# EAGLE board Ground Station 2019-2020 (EAGLE 9.1.3)
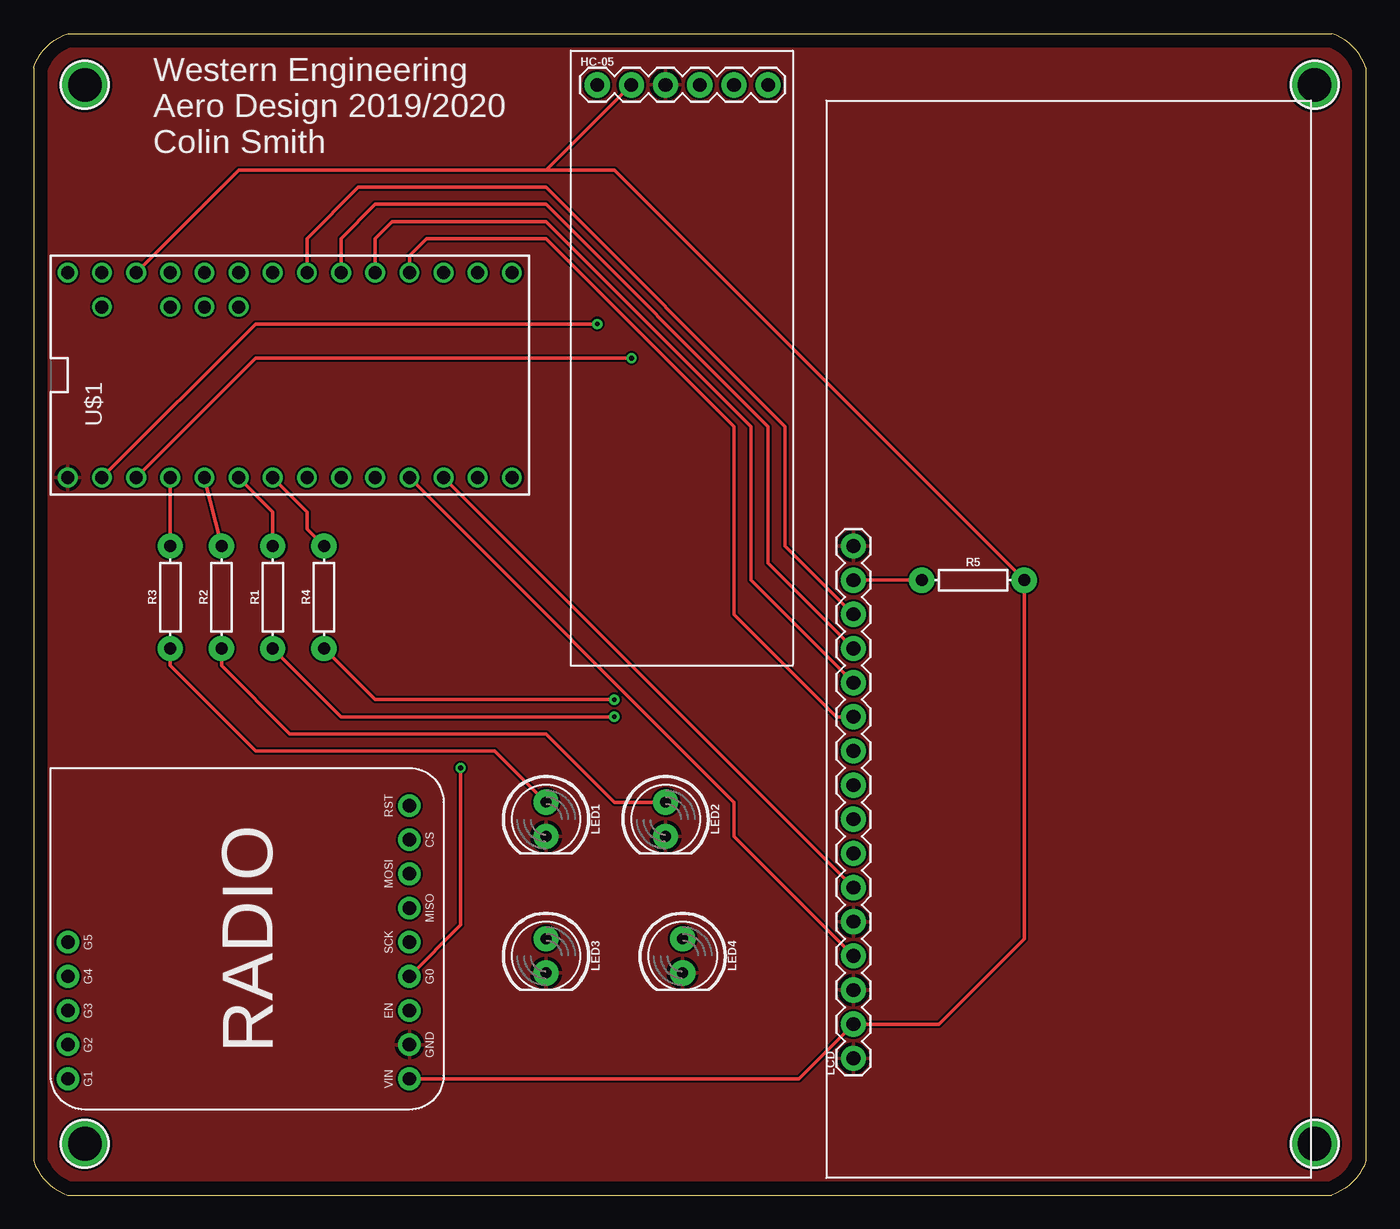
[diagram p0: board, top side]
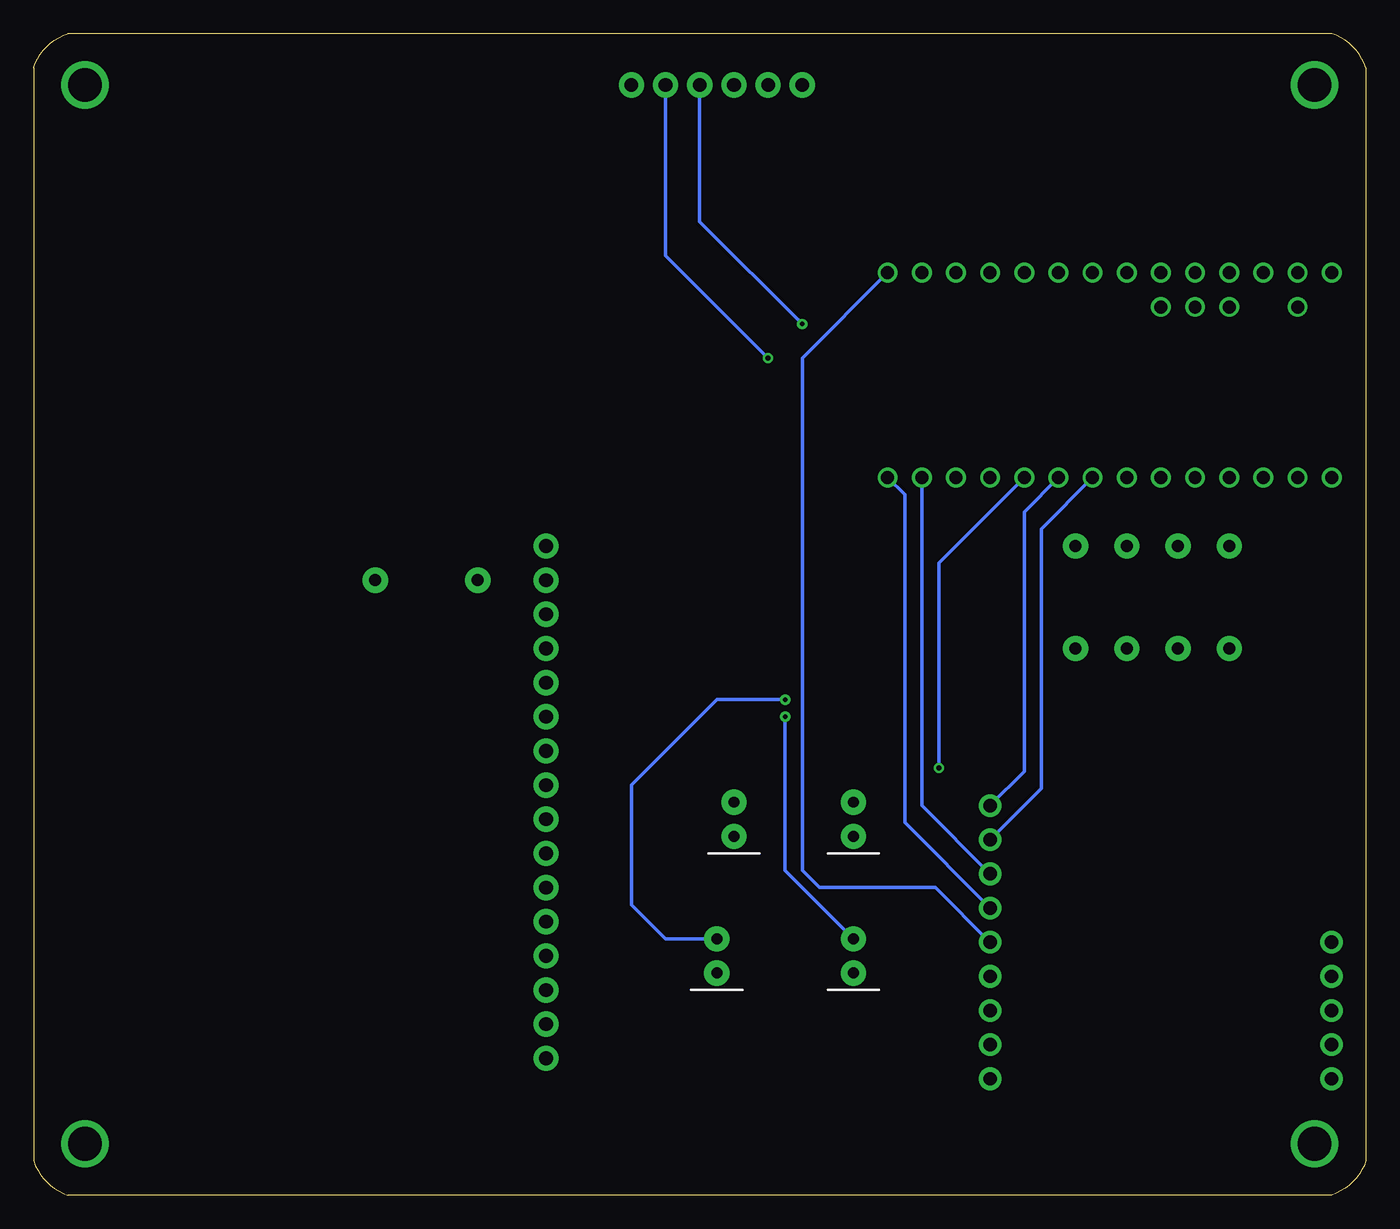
[diagram p1: board, bottom side, seen from below]

Size 99.06 x 86.36 mm. Coordinates in mm from the lower left corner, seen from the top.
Outline: 2.54,0 82.55,0 96.52,0 arc53 99.06,2.54 99.06,20.32 99.06,83.82 arc53 96.52,86.36 95.25,86.36 82.55,86.36 2.54,86.36 arc53 0,83.82 0,19.05 0,3.81 0,2.54 arc53 2.54,0
Copper layers (1*16): Top 0.035mm / dielectric 1.5mm / Bottom 0.035mm
Design rules "default": minimum track width 6mil, minimum drill 0.35mm, track to track 6mil, track to pad 6mil, pad to pad 6mil, via to via 6mil, smd to smd 6mil, copper to edge 40mil, drill to drill 6mil, minimum pad ring 10mil, minimum via ring 8mil, stop-mask expansion 4mil, vias tented up to drill 0mil, thermal gap 10mil

## Footprints (pad centres in the part's own frame; a part is rotated, then mirrored left to right if it is on the bottom)
1X06 = drill 1.016 pad 1.88: 1 0,0; 2 2.54,0; 3 5.08,0; 4 7.62,0; 5 10.16,0; 6 12.7,0
1X16 = drill 1.016 pad 1.88: 1 0,0; 2 2.54,0; 3 5.08,0; 4 7.62,0; 5 10.16,0; 6 12.7,0; 7 15.24,0; 8 17.78,0; 9 20.32,0; 10 22.86,0; 11 25.4,0; 12 27.94,0; 13 30.48,0; 14 33.02,0; 15 35.56,0; 16 38.1,0
LED_5MM = drill 0.813 pad 1.88: A -1.27,0; K 1.27,0
AXIAL-0.3 = drill 0.9 pad 1.88: P$1 -3.81,0; P$2 3.81,0
ADAFRUIT_RFM95W_LORA_RADIO = drill 1 pad 1.676: 1 2.29,-26.67; 2 4.83,-26.67; 3 7.37,-26.67; 4 9.91,-26.67; 5 12.45,-26.67; 6 14.99,-26.67; 7 17.53,-26.67; 8 20.07,-26.67; 9 22.61,-26.67; 10 2.29,-1.27; 11 4.83,-1.27; 12 7.37,-1.27; 13 9.91,-1.27; 14 12.45,-1.27
TEENSY_3.0-3.2&LC_DIL+4 = drill 0.965: 0 -7.62,13.97; 1 -7.62,11.43; 2 -7.62,8.89; 3 -7.62,6.35; 3.3V 7.62,11.43; 4 -7.62,3.81; 5 -7.62,1.27; 6 -7.62,-1.27; 7 -7.62,-3.81; 8 -7.62,-6.35; 9 -7.62,-8.89; 10 -7.62,-11.43; 11 -7.62,-13.97; 12 -7.62,-16.51; 13 7.62,-16.51; 14/A0 7.62,-13.97; 15/A1 7.62,-11.43; 16/A2 7.62,-8.89; 17/A3 7.62,-6.35; 18/A4 7.62,-3.81; 19/A5 7.62,-1.27; 20/A6 7.62,1.27; 21/A7 7.62,3.81; 22/A8 7.62,6.35; 23/A9 7.62,8.89; A10 5.08,6.35; A11 5.08,3.81; AGND 7.62,13.97; AREF 5.08,8.89; GND -7.62,16.51; VIN 7.62,16.51; VUSB 5.08,13.97
MOUNTINGHOLE_2.5_PLATED = drill 2.5 pad 3.2: P$1 0,0

## Placement (x,y rotation side)
HC-05  [1X06]  41.91,82.55 0 top
LCD  [1X16]  60.96,10.16 90 top
LED1  [LED_5MM]  38.1,27.94 270 top
LED2  [LED_5MM]  46.99,27.94 270 top
LED3  [LED_5MM]  38.1,17.78 270 top
LED4  [LED_5MM]  48.26,17.78 270 top
R1  330  [AXIAL-0.3]  17.78,44.45 90 top
R2  330  [AXIAL-0.3]  13.97,44.45 90 top
R3  330  [AXIAL-0.3]  10.16,44.45 90 top
R4  330  [AXIAL-0.3]  21.59,44.45 90 top
R5  220  [AXIAL-0.3]  69.85,45.72 0 top
U1  ADAFRUIT_RFM95W_LORA_RADIO  [ADAFRUIT_RFM95W_LORA_RADIO]  1.27,6.35 90 top
U$1  TEENSY_3.1-3.2_DIL+4  [TEENSY_3.0-3.2&LC_DIL+4]  19.05,60.96 90 top
U$2  MOUNTINGHOLE2.5  [MOUNTINGHOLE_2.5_PLATED]  3.81,3.81 0 top
U$3  MOUNTINGHOLE2.5  [MOUNTINGHOLE_2.5_PLATED]  95.25,3.81 0 top
U$4  MOUNTINGHOLE2.5  [MOUNTINGHOLE_2.5_PLATED]  95.25,82.55 0 top
U$5  MOUNTINGHOLE2.5  [MOUNTINGHOLE_2.5_PLATED]  3.81,82.55 0 top

## Library data of the parts
HC-05 = SparkFun-Connectors; PROD_ID: CONN-08437
LCD = SparkFun-Connectors
LED1-LED4 = SparkFun-LED
R1-R5 = SparkFun-Resistors; PROD_ID: RES-8371
U1 = AERO_Eagle_Library
U$1 = Teensy_3_and_LC_Series_Boards_v1.4
U$2-U$5 = microbuilder

## Nets
3.3V: HC-05.2 LCD.2 R5.P$2 U1.1 U$1.3.3V
AGND: U$1.AGND
AREF: U$1.AREF
CS: U1.8 U$1.6
D4: LCD.11 U$1.16/A2
D5: LCD.12 U$1.17/A3
D6: LCD.13 U$1.18/A4
D7: LCD.14 U$1.19/A5
G0: U1.4 U$1.8
GND: HC-05.3 LCD.1 LCD.3 LCD.5 LCD.16 LED1.K LED2.K LED3.K LED4.K U1.2 U$1.GND
LCD_RX: LCD.4 U$1.9
LCD_TX: LCD.6 U$1.10
LED1: R3.P$2 U$1.2
LED2: R2.P$2 U$1.3
LED3: R1.P$2 U$1.4
LED4: R4.P$2 U$1.5
MISO: U1.6 U$1.12
MOSI: U1.7 U$1.11
N$1: LED3.A R1.P$1
N$2: LED2.A R2.P$1
N$3: LED1.A R3.P$1
N$4: LCD.15 R5.P$1
N$5: LED4.A R4.P$1
RST: U1.9 U$1.7
RX1: HC-05.4 U$1.0
SCK: U1.5 U$1.13
TX1: HC-05.5 U$1.1
VIN: U$1.VIN
VUSB: U$1.VUSB

## Tracks (layer width: path | path; a pad name or v marks a point on that pad's centre or on a via)
3.3V
  Top 0.254: U$1.3.3V 15.24,76.2 38.1,76.2 | 38.1,76.2 HC-05.2 | 38.1,76.2 43.18,76.2 R5.P$2 73.66,19.05 67.31,12.7 LCD.2 56.9,8.64 U1.1
CS
  Bottom 0.254: U1.8 24.13,30.23 24.13,49.53 U$1.6
D4
  Top 0.254: U$1.16/A2 27.94,69.85 29.21,71.12 38.1,71.12 52.07,57.15 52.07,43.18 59.69,35.56 LCD.11
D5
  Top 0.254: U$1.17/A3 25.4,71.12 26.67,72.39 38.1,72.39 53.34,57.15 53.34,45.72 LCD.12
D6
  Top 0.254: U$1.18/A4 22.86,71.12 25.4,73.66 38.1,73.66 54.61,57.15 54.61,46.99 LCD.13
D7
  Top 0.254: U$1.19/A5 20.32,71.12 24.13,74.93 38.1,74.93 55.88,57.15 55.88,48.26 LCD.14
G0  (via drill 0.35)
  Top 0.254: U1.4 31.75,20.07 v31.75,31.75
  Bottom 0.254: v31.75,31.75 31.75,46.99 U$1.8
GND
  pour Top: -1.27,87.63 101.6,87.63 101.6,-1.27 -1.27,-1.27
LCD_RX
  Top 0.254: LCD.4 52.07,26.67 52.07,29.21 U$1.9
LCD_TX
  Top 0.254: LCD.6 U$1.10
LED1
  Top 0.254: U$1.2 R3.P$2
LED2
  Top 0.254: U$1.3 R2.P$2
LED3
  Top 0.254: U$1.4 17.78,50.8 R1.P$2
LED4
  Top 0.254: U$1.5 20.32,50.8 20.32,49.53 R4.P$2
MISO
  Bottom 0.254: U1.6 34.29,27.69 34.29,52.07 U$1.12
MOSI
  Bottom 0.254: U1.7 33.02,28.96 U$1.11
N$1  (via drill 0.35)
  Top 0.254: R1.P$1 22.86,35.56 v43.18,35.56
  Bottom 0.254: v43.18,35.56 43.18,24.13 LED3.A
N$2
  Top 0.254: R2.P$1 13.97,39.37 19.05,34.29 38.1,34.29 43.18,29.21 LED2.A
N$3
  Top 0.254: R3.P$1 10.16,39.37 16.51,33.02 34.29,33.02 LED1.A
N$4
  Top 0.254: R5.P$1 LCD.15
N$5  (via drill 0.35)
  Top 0.254: R4.P$1 25.4,36.83 v43.18,36.83
  Bottom 0.254: v43.18,36.83 48.26,36.83 54.61,30.48 54.61,21.59 52.07,19.05 LED4.A
RST
  Bottom 0.254: U1.9 25.4,31.5 25.4,50.8 U$1.7
RX1  (via drill 0.35)
  Top 0.254: U$1.0 16.51,64.77 v41.91,64.77
  Bottom 0.254: v41.91,64.77 49.53,72.39 HC-05.4
SCK
  Bottom 0.254: U1.5 32,22.86 40.64,22.86 41.91,24.13 41.91,62.23 U$1.13
TX1  (via drill 0.35)
  Top 0.254: U$1.1 16.51,62.23 v44.45,62.23
  Bottom 0.254: v44.45,62.23 52.07,69.85 HC-05.5

## Text on the board
tPlace: Western Engineering / Aero Design 2019/2020 / Colin Smith